# EAGLE board XMICRO-BP8 (EAGLE 6.3), part 1 of 2
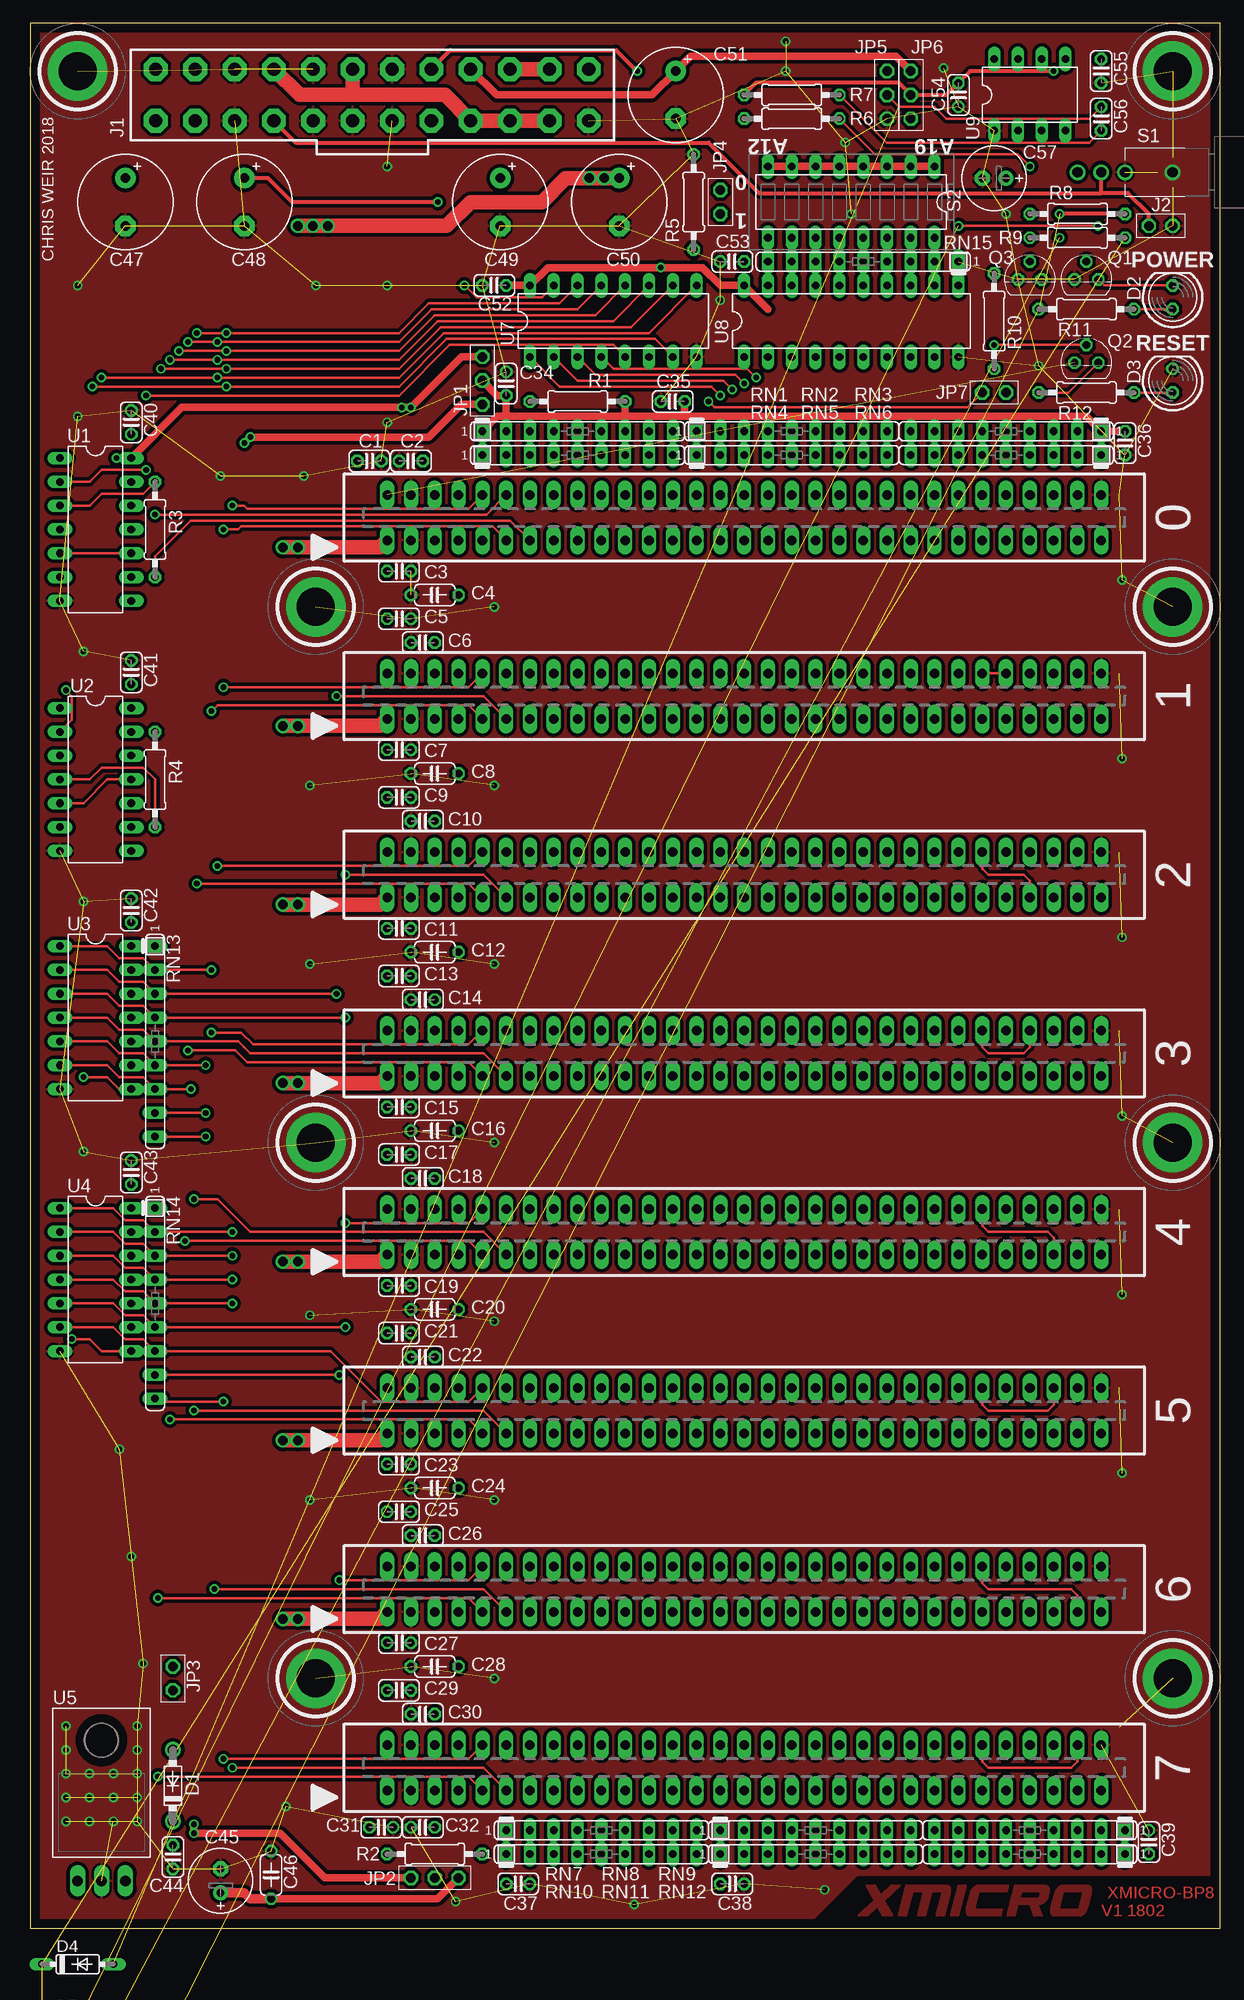
[diagram p0: board, top side]
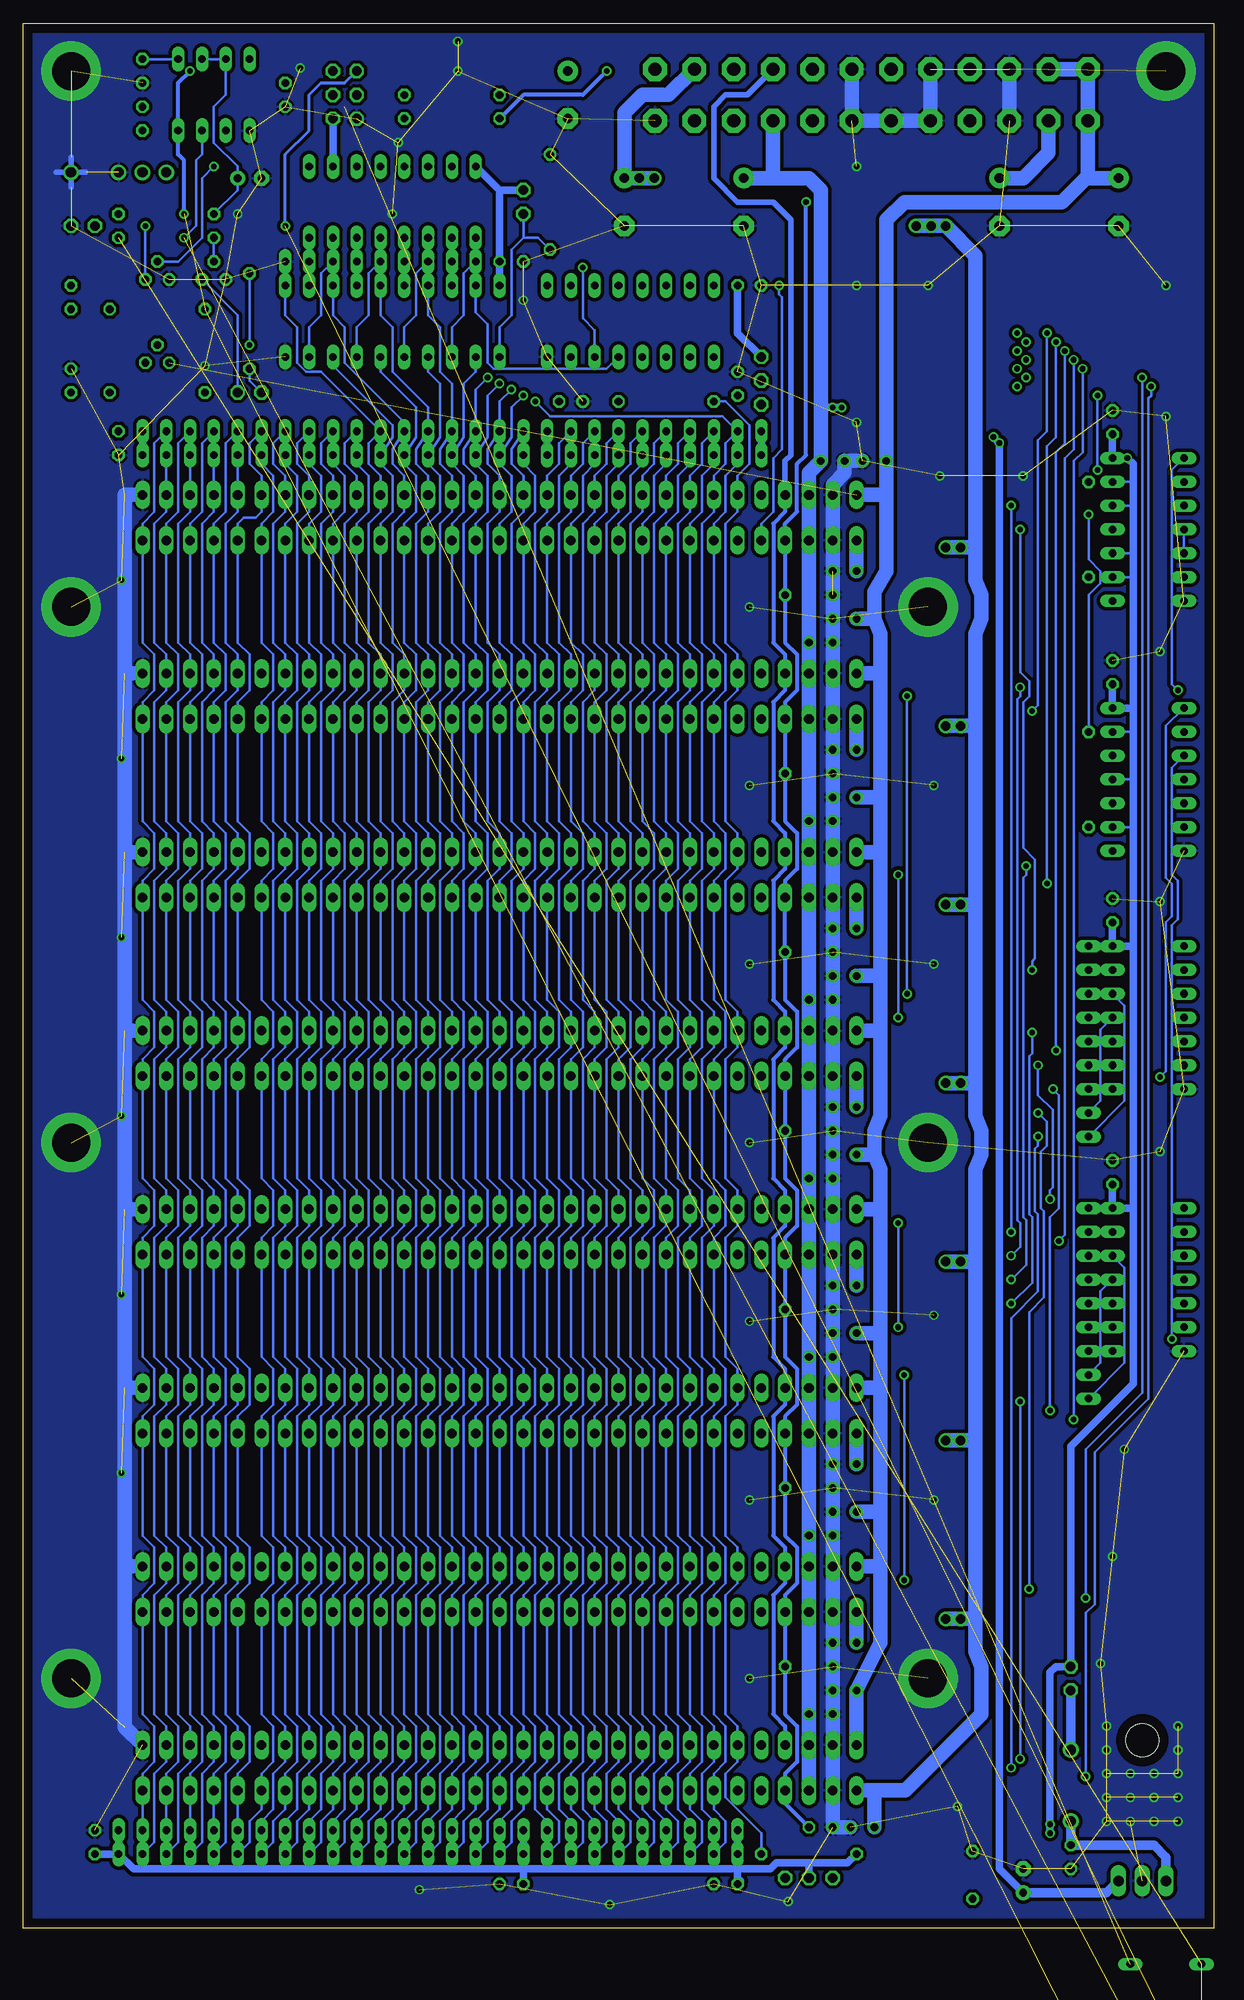
[diagram p1: board, bottom side, seen from below]

Size 127 x 203.2 mm. Coordinates in mm from the lower left corner, seen from the top.
Outline: 0,0 127,0 127,203.2 0,203.2 0,0
Copper layers (1*16): Top 0.03048125mm / dielectric 62mil / Bottom 0.03048125mm
Design rules "EasyEDA Conservative *": minimum track width 10mil, minimum drill 20mil, track to track 12mil, track to pad 12mil, pad to pad 12mil, via to via 12mil, smd to smd 8mil, copper to edge 40mil, drill to drill 10mil, minimum pad ring 10mil, minimum via ring 8mil, stop-mask expansion 4mil, vias tented up to drill 50mil, thermal gap 10mil
Net classes: 1 GND: width 0.254 mm, clearance 0.381 mm
tKeepout: area 30.2,182.9 to 42.9,189.2
bRestrict: area 121,186.4 to 122.9,188.3

## Footprints (pad centres in the part's own frame; a part is rotated, then mirrored left to right if it is on the bottom)
EDGE62F = drill 1.016 long: 1 -38.1,-2.426; 2 -38.1,2.426; 3 -35.56,-2.426; 4 -35.56,2.426; 5 -33.02,-2.426; 6 -33.02,2.426; 7 -30.48,-2.426; 8 -30.48,2.426; 9 -27.94,-2.426; 10 -27.94,2.426; 11 -25.4,-2.426; 12 -25.4,2.426; 13 -22.86,-2.426; 14 -22.86,2.426; 15 -20.32,-2.426; 16 -20.32,2.426; 17 -17.78,-2.426; 18 -17.78,2.426; 19 -15.24,-2.426; 20 -15.24,2.426; 21 -12.7,-2.426; 22 -12.7,2.426; 23 -10.16,-2.426; 24 -10.16,2.426; 25 -7.62,-2.426; 26 -7.62,2.426; 27 -5.08,-2.426; 28 -5.08,2.426; 29 -2.54,-2.426; 30 -2.54,2.426; 31 0,-2.426; 32 0,2.426; 33 2.54,-2.426; 34 2.54,2.426; 35 5.08,-2.426; 36 5.08,2.426; 37 7.62,-2.426; 38 7.62,2.426; 39 10.16,-2.426; 40 10.16,2.426; 41 12.7,-2.426; 42 12.7,2.426; 43 15.24,-2.426; 44 15.24,2.426; 45 17.78,-2.426; 46 17.78,2.426; 47 20.32,-2.426; 48 20.32,2.426; 49 22.86,-2.426; 50 22.86,2.426; 51 25.4,-2.426; 52 25.4,2.426; 53 27.94,-2.426; 54 27.94,2.426; 55 30.48,-2.426; 56 30.48,2.426; 57 33.02,-2.426; 58 33.02,2.426; 59 35.56,-2.426; 60 35.56,2.426; 61 38.1,-2.426; 62 38.1,2.426
C025-024X044 = drill 0.813 octagon: 1 -1.27,0; 2 1.27,0
C050-024X044 = drill 0.813 octagon: 1 -2.54,0; 2 2.54,0
E2,5-7 = drill 0.813 pad 1.6: + -1.27,0 | drill 0.813 pad 1.6 octagon: - 1.27,0
C-10-5 = drill 1.016 pad 2.184: + -2.54,0 | drill 1.016 pad 2.184 octagon: - 2.54,0
DO41-7.6 = drill 1.1 pad 1.7: A 3.81,0; C -3.81,0
LED5MM = drill 0.813 octagon: A -1.27,0; K 1.27,0
DO35-7 = drill 0.813 long: A 3.81,0; C -3.81,0
ATX24 = drill 1.4 pad 2.54 octagon: 1 23.1,-2.75; 2 18.9,-2.75; 3 14.7,-2.75; 4 10.5,-2.75; 5 6.3,-2.75; 6 2.1,-2.75; 7 -2.1,-2.75; 8 -6.3,-2.75; 9 -10.5,-2.75; 10 -14.7,-2.75; 11 -18.9,-2.75; 12 -23.1,-2.75; 13 23.1,2.75; 14 18.9,2.75; 15 14.7,2.75; 16 10.5,2.75; 17 6.3,2.75; 18 2.1,2.75; 19 -2.1,2.75; 20 -6.3,2.75; 21 -10.5,2.75; 22 -14.7,2.75; 23 -18.9,2.75; 24 -23.1,2.75
1X02 = drill 1.016 octagon: 1 -1.27,0; 2 1.27,0
1X03 = drill 1.016 octagon: 1 -2.54,0; 2 0,0; 3 2.54,0
TO92 = drill 0.813 octagon: 1 -1.27,0; 2 0,1.905; 3 1.27,0
0207/10 = drill 0.813 octagon: 1 -5.08,0; 2 5.08,0
SIL9 = drill 0.813 long: 1 -10.16,0; 2 -7.62,0; 3 -5.08,0; 4 -2.54,0; 5 0,0; 6 2.54,0; 7 5.08,0; 8 7.62,0; 9 10.16,0
T411013 = drill 1.1: P$1 5.08,0; P$2 7.62,0; P$3 10.16,0; P$4 0,0
SW-DIP8 = drill 0.813 long: 1 -8.89,-3.81; 2 -6.35,-3.81; 3 -3.81,-3.81; 4 -1.27,-3.81; 5 1.27,-3.81; 6 3.81,-3.81; 7 6.35,-3.81; 8 8.89,-3.81; 9 8.89,3.81; 10 6.35,3.81; 11 3.81,3.81; 12 1.27,3.81; 13 -1.27,3.81; 14 -3.81,3.81; 15 -6.35,3.81; 16 -8.89,3.81
DIL14 = drill 0.813 long: 1 -7.62,-3.81; 2 -5.08,-3.81; 3 -2.54,-3.81; 4 0,-3.81; 5 2.54,-3.81; 6 5.08,-3.81; 7 7.62,-3.81; 8 7.62,3.81; 9 5.08,3.81; 10 2.54,3.81; 11 0,3.81; 12 -2.54,3.81; 13 -5.08,3.81; 14 -7.62,3.81
TO220H = drill 1.118 long: 1 -2.54,-10.16; 2 0,-10.16; 3 2.54,-10.16 | hole 3.5: 0,4.826
DIL16 = drill 0.813 long: 1 -8.89,-3.81; 2 -6.35,-3.81; 3 -3.81,-3.81; 4 -1.27,-3.81; 5 1.27,-3.81; 6 3.81,-3.81; 7 6.35,-3.81; 8 8.89,-3.81; 9 8.89,3.81; 10 6.35,3.81; 11 3.81,3.81; 12 1.27,3.81; 13 -1.27,3.81; 14 -3.81,3.81; 15 -6.35,3.81; 16 -8.89,3.81
DIL20 = drill 0.813 long: 1 -11.43,-3.81; 2 -8.89,-3.81; 3 -6.35,-3.81; 4 -3.81,-3.81; 5 -1.27,-3.81; 6 1.27,-3.81; 7 3.81,-3.81; 8 6.35,-3.81; 9 8.89,-3.81; 10 11.43,-3.81; 11 11.43,3.81; 12 8.89,3.81; 13 6.35,3.81; 14 3.81,3.81; 15 1.27,3.81; 16 -1.27,3.81; 17 -3.81,3.81; 18 -6.35,3.81; 19 -8.89,3.81; 20 -11.43,3.81
DIL-08 = drill 0.813 long: 1 -3.81,-3.81; 2 -1.27,-3.81; 3 1.27,-3.81; 4 3.81,-3.81; 5 3.81,3.81; 6 1.27,3.81; 7 -1.27,3.81; 8 -3.81,3.81

## Placement (x,y rotation side)
0  XMICRO-BUS-PHYSICAL-EDGE62F  [EDGE62F]  76.2,150.5 0 top
1  XMICRO-BUS-PHYSICAL-EDGE62F  [EDGE62F]  76.2,131.44 0 top
2  XMICRO-BUS-PHYSICAL-EDGE62F  [EDGE62F]  76.2,112.39 0 top
3  XMICRO-BUS-PHYSICAL-EDGE62F  [EDGE62F]  76.2,93.34 0 top
4  XMICRO-BUS-PHYSICAL-EDGE62F  [EDGE62F]  76.2,74.3 0 top
5  XMICRO-BUS-PHYSICAL-EDGE62F  [EDGE62F]  76.2,55.24 0 top
6  XMICRO-BUS-PHYSICAL-EDGE62F  [EDGE62F]  76.2,36.2 0 top
7  XMICRO-BUS-PHYSICAL-EDGE62F  [EDGE62F]  76.2,17.14 0 top
C1  0.1uF  [C025-024X044]  36.2,156.53 0 top
C2  0.1uF  [C025-024X044]  40.64,156.53 180 top
C3  0.1uF  [C025-024X044]  39.37,144.78 0 top
C4  0.1uF  [C050-024X044]  43.18,142.24 180 top
C5  0.1uF  [C025-024X044]  39.37,139.7 0 top
C6  0.1uF  [C025-024X044]  41.91,137.16 180 top
C7  0.1uF  [C025-024X044]  39.37,125.73 0 top
C8  0.1uF  [C050-024X044]  43.18,123.19 180 top
C9  0.1uF  [C025-024X044]  39.37,120.65 0 top
C10  0.1uF  [C025-024X044]  41.91,118.11 180 top
C11  0.1uF  [C025-024X044]  39.37,106.68 0 top
C12  0.1uF  [C050-024X044]  43.18,104.14 180 top
C13  0.1uF  [C025-024X044]  39.37,101.6 0 top
C14  0.1uF  [C025-024X044]  41.91,99.06 180 top
C15  0.1uF  [C025-024X044]  39.37,87.63 0 top
C16  0.1uF  [C050-024X044]  43.18,85.09 180 top
C17  0.1uF  [C025-024X044]  39.37,82.55 0 top
C18  0.1uF  [C025-024X044]  41.91,80.01 180 top
C19  0.1uF  [C025-024X044]  39.37,68.58 0 top
C20  0.1uF  [C050-024X044]  43.18,66.04 180 top
C21  0.1uF  [C025-024X044]  39.37,63.5 0 top
C22  0.1uF  [C025-024X044]  41.91,60.96 180 top
C23  0.1uF  [C025-024X044]  39.37,49.53 0 top
C24  0.1uF  [C050-024X044]  43.18,46.99 180 top
C25  0.1uF  [C025-024X044]  39.37,44.45 0 top
C26  0.1uF  [C025-024X044]  41.91,41.91 180 top
C27  0.1uF  [C025-024X044]  39.37,30.48 0 top
C28  0.1uF  [C050-024X044]  43.18,27.94 180 top
C29  0.1uF  [C025-024X044]  39.37,25.4 0 top
C30  0.1uF  [C025-024X044]  41.91,22.86 180 top
C31  0.1uF  [C025-024X044]  37.47,10.79 0 top
C32  0.1uF  [C025-024X044]  41.91,10.79 180 top
C34  0.1uF  [C025-024X044]  50.8,164.78 90 top
C35  0.1uF  [C025-024X044]  68.58,162.88 180 top
C36  0.1uF  [C025-024X044]  116.84,158.43 270 top
C37  0.1uF  [C025-024X044]  52.07,4.76 0 top
C38  0.1uF  [C025-024X044]  74.93,4.76 0 top
C39  0.1uF  [C025-024X044]  119.38,9.21 90 top
C40  0.1uF  [C025-024X044]  10.79,160.66 90 top
C41  0.1uF  [C025-024X044]  10.79,133.99 90 top
C42  0.1uF  [C025-024X044]  10.79,108.58 90 top
C43  0.1uF  [C025-024X044]  10.79,80.64 90 top
C44  0.1uF  [C025-024X044]  15.24,7.62 270 top
C45  22uF 5V 1.5 Ohm ESR  [E2,5-7]  20.32,5.08 90 top
C46  0.1uF  [C050-024X044]  25.72,5.71 90 top
C47  100uF 25V  [C-10-5]  10.16,184.15 270 top
C48  220uF 10V  [C-10-5]  22.86,184.15 270 top
C49  220uF 10V  [C-10-5]  50.16,184.15 270 top
C50  100uF 25V  [C-10-5]  62.87,184.15 270 top
C51  220uF 10V  [C-10-5]  68.9,195.58 270 top
C52  0.1uF  [C025-024X044]  49.53,175.26 180 top
C53  0.1uF  [C025-024X044]  74.93,177.8 180 top
C54  0.1uF  [C025-024X044]  99.06,195.58 270 top
C55  10nF  [C025-024X044]  114.3,198.12 270 top
C56  0.1uF  [C025-024X044]  114.3,193.04 90 top
C57  10uF  [E2,5-7]  102.87,186.69 180 top
D1  1N5817  [DO41-7.6]  15.24,15.24 90 top
D2  GREEN  [LED5MM]  121.92,173.99 90 top
D3  RED  [LED5MM]  121.92,165.1 90 top
D4  [DO35-7]  5.08,-3.81 0 top  (outside the outline)
D5  [DO35-7]  5.08,-10.16 0 top  (outside the outline)
J1  ATX24  [ATX24]  36.51,195.58 180 top
J2  [1X02]  120.65,181.61 0 top
JP1  PINHD1X3THRU  [1X03]  48.26,165.1 270 top
JP2  PINHD1X3THRU  [1X03]  43.18,5.4 0 top
JP3  [1X02]  15.24,26.67 90 top
JP4  [1X02]  73.66,184.15 270 top
JP5  [1X03]  91.44,195.58 270 top
JP6  [1X03]  93.98,195.58 90 top
JP7  [1X02]  102.87,163.83 180 top
Q1  2N5088  [TO92]  112.71,175.9 0 top
Q2  2N4403  [TO92]  112.71,167 0 top
Q3  2N5088  [TO92]  106.68,175.9 0 top
R1  270  [0207/10]  58.42,162.88 180 top
R2  270  [0207/10]  43.18,7.94 0 top
R3  0  [0207/10]  13.34,149.22 270 top
R4  0  [0207/10]  13.34,122.56 90 top
R5  10k  [0207/10]  70.8,184.15 270 top
R6  100k  [0207/10]  81.28,193.04 0 top
R7  200k  [0207/10]  81.28,195.58 0 top
R8  22k  [0207/10]  111.76,182.88 180 top
R9  22k  [0207/10]  111.76,180.34 180 top
R10  470  [0207/10]  102.87,171.45 90 top
R11  470  [0207/10]  112.71,172.72 180 top
R12  220  [0207/10]  112.71,163.83 180 top
R13  10k  [0207/10]  6.35,-17.78 0 top  (outside the outline)
RN1  270  [SIL9]  58.42,159.7 0 top
RN2  270  [SIL9]  81.28,159.7 0 top
RN3  270  [SIL9]  104.14,159.7 180 top
RN4  270  [SIL9]  58.42,157.16 0 top
RN5  270  [SIL9]  81.28,157.16 0 top
RN6  270  [SIL9]  104.14,157.16 180 top
RN7  270  [SIL9]  60.96,10.48 0 top
RN8  270  [SIL9]  83.82,10.48 0 top
RN9  270  [SIL9]  106.68,10.48 180 top
RN10  270  [SIL9]  60.96,7.94 0 top
RN11  270  [SIL9]  83.82,7.94 0 top
RN12  270  [SIL9]  106.68,7.94 180 top
RN13  3.3k  [SIL9]  13.34,94.61 270 top
RN14  3.3k  [SIL9]  13.34,66.67 270 top
RN15  10k  [SIL9]  88.9,177.8 180 top
S1  SPDTT411013  [T411013]  121.92,187.32 180 top
S2  [SW-DIP8]  87.63,184.15 180 top
U1  7408  [DIL14]  6.99,149.22 270 top
U2  7404  [DIL14]  6.99,122.56 270 top
U3  7430  [DIL14]  6.99,97.16 270 top
U4  7430  [DIL14]  6.99,69.22 270 top
U5  TL-SCSI285  [TO220H]  7.62,15.24 0 top
U7  74138  [DIL16]  62.23,171.45 0 top
U8  74688  [DIL20]  87.63,171.45 0 top
U9  555  [DIL-08]  106.68,195.58 0 top

## Library data of the parts
0 1-7 C47-C51 J1 J2 JP1-JP7 Q1-Q3 S1 S2 U5 = Custom
C1-C32 C34-C44 C46 C52-C56 R1-R13 = resistor
C45 C57 = rcl
D1 D4 D5 = diode
D2 D3 = led
RN1-RN15 = resistor-sil; OC_FARNELL: unknown; OC_NEWARK: unknown
U1-U4 U7 U8 = 74xx-us
U9 = st-microelectronics; MF: Arrow Electronics; MPN: NE555N; OC_FARNELL: 1467742; OC_NEWARK: 89K1486

## Nets
!BUSACK: 0.20 1.20 2.20 3.20 4.20 5.20 6.20 7.20 RN1.5 RN7.5
!BUSRQ0: 0.10 RN14.2 U4.1
!BUSRQ1: 1.10 RN14.3 U4.2
!BUSRQ2: 2.10 RN14.4 U4.3
!BUSRQ3: 3.10 RN14.5 U4.4
!BUSRQ4: 4.10 RN14.6 U4.5
!BUSRQ5: 5.10 RN14.7 U4.6
!BUSRQ6: 6.10 RN14.8 U4.11
!BUSRQ7: 7.10 RN14.9 U4.12
!CBR: 0.12 1.12 2.12 3.12 4.12 5.12 6.12 7.12 R1.2 R2.2 R4.2
!CINH: 0.13 1.13 2.13 3.13 4.13 5.13 6.13 7.13 R3.2 RN4.2 RN10.2
!CS0: 0.9 U7.15
!CS1: 1.9 U7.14
!CS2: 2.9 U7.13
!CS3: 3.9 U7.12
!CS4: 4.9 U7.11
!CS5: 5.9 U7.10
!CS6: 6.9 U7.9
!CS7: 7.9 U7.7
!FETCH: 0.19 1.19 2.19 3.19 4.19 5.19 6.19 7.19 RN4.5 RN10.5
!HALT: 0.17 1.17 2.17 3.17 4.17 5.17 6.17 7.17 RN4.4 RN10.4
!INH0: 0.11 RN13.2 U3.1
!INH1: 1.11 RN13.3 U3.2
!INH2: 2.11 RN13.4 U3.3
!INH3: 3.11 RN13.5 U3.4
!INH4: 4.11 RN13.6 U3.5
!INH5: 5.11 RN13.7 U3.6
!INH6: 6.11 RN13.8 U3.11
!INH7: 7.11 RN13.9 U3.12
!INHPCS: U1.2 U7.5 U8.19
!INT: 0.51 1.51 2.51 3.51 4.51 5.51 6.51 7.51 RN6.6 RN12.6
!IRQ0: 0.52 0.53 1.53 2.53 3.53 4.53 5.53 6.53 7.53 RN3.6 RN9.6
!IRQ1: 0.54 1.52 1.54 2.54 3.54 4.54 5.54 6.54 7.54 RN6.5 RN12.5
!IRQ2: 0.55 1.55 2.52 2.55 3.55 4.55 5.55 6.55 7.55 RN3.5 RN9.5
!IRQ3: 0.56 1.56 2.56 3.52 3.56 4.56 5.56 6.56 7.56 RN6.4 RN12.4
!IRQ4: 0.57 1.57 2.57 3.57 4.52 4.57 5.57 6.57 7.57 RN3.4 RN9.4
!IRQ5: 0.58 1.58 2.58 3.58 4.58 5.52 5.58 6.58 7.58 RN6.3 RN12.3
!IRQ6: 0.59 1.59 2.59 3.59 4.59 5.59 6.52 6.59 7.59 RN3.3 RN9.3
!IRQ7: 0.60 1.60 2.60 3.60 4.60 5.60 6.60 7.52 7.60 RN6.2 RN12.2
!NMI: 0.61 1.61 2.61 3.61 4.61 5.61 6.61 7.61 RN3.2 RN9.2
!RD: 0.21 1.21 2.21 3.21 4.21 5.21 6.21 7.21 RN4.6 RN10.6
!RST: 0.14 1.14 2.14 3.14 4.14 5.14 6.14 7.14 JP7.2 R10.1 RN1.2 RN7.2
!WAIT: 0.18 1.18 2.18 3.18 4.18 5.18 6.18 7.18 RN1.4 RN7.4
!WR: 0.22 1.22 2.22 3.22 4.22 5.22 6.22 7.22 RN1.6 RN7.6
+3.3V: 0.2 1.2 2.2 3.2 4.2 5.2 6.2 7.2 C1.1 C5.1 C9.1 C13.1 C17.1 C21.1 C25.1 C29.1 C47.+ J1.1 J1.2 J1.13 Q2.1
+5VSB: 0.8 1.8 2.8 3.8 4.8 5.8 6.8 7.8 C51.+ J1.9 JP6.3
+12V: 0.1 1.1 2.1 3.1 4.1 5.1 6.1 7.1 C3.1 C7.1 C11.1 C15.1 C19.1 C23.1 C27.1 C31.1 C50.+ J1.10 J1.11
-12V: 0.7 1.7 2.7 3.7 4.7 5.7 6.7 7.7 C4.1 C8.1 C12.1 C16.1 C20.1 C24.1 C28.1 C32.1 C48.+ J1.14
A0: 0.23 1.23 2.23 3.23 4.23 5.23 6.23 7.23 RN4.7 RN10.7
A1: 0.24 1.24 2.24 3.24 4.24 5.24 6.24 7.24 RN1.7 RN7.7
A2: 0.25 1.25 2.25 3.25 4.25 5.25 6.25 7.25 RN4.8 RN10.8
A3: 0.26 1.26 2.26 3.26 4.26 5.26 6.26 7.26 RN1.8 RN7.8
A4: 0.27 1.27 2.27 3.27 4.27 5.27 6.27 7.27 RN4.9 RN10.9
A5: 0.28 1.28 2.28 3.28 4.28 5.28 6.28 7.28 RN1.9 RN7.9
A6: 0.29 1.29 2.29 3.29 4.29 5.29 6.29 7.29 RN5.2 RN11.2
A7: 0.30 1.30 2.30 3.30 4.30 5.30 6.30 7.30 RN2.2 RN8.2
A8: 0.31 1.31 2.31 3.31 4.31 5.31 6.31 7.31 RN5.3 RN11.3 U7.1
A9: 0.32 1.32 2.32 3.32 4.32 5.32 6.32 7.32 RN2.3 RN8.3 U7.2
A10: 0.33 1.33 2.33 3.33 4.33 5.33 6.33 7.33 RN5.4 RN11.4 U7.3
A11: 0.34 1.34 2.34 3.34 4.34 5.34 6.34 7.34 RN2.4 RN8.4 U7.4
A12: 0.35 1.35 2.35 3.35 4.35 5.35 6.35 7.35 RN5.5 RN11.5 U8.2
A13: 0.36 1.36 2.36 3.36 4.36 5.36 6.36 7.36 RN2.5 RN8.5 U8.17
A14: 0.37 1.37 2.37 3.37 4.37 5.37 6.37 7.37 RN5.6 RN11.6 U8.4
A15: 0.38 1.38 2.38 3.38 4.38 5.38 6.38 7.38 RN2.6 RN8.6 U8.15
A16: 0.39 1.39 2.39 3.39 4.39 5.39 6.39 7.39 RN5.7 RN11.7 U8.6
A17: 0.40 1.40 2.40 3.40 4.40 5.40 6.40 7.40 RN2.7 RN8.7 U8.13
A18: 0.41 1.41 2.41 3.41 4.41 5.41 6.41 7.41 RN5.8 RN11.8 U8.8
A19: 0.42 1.42 2.42 3.42 4.42 5.42 6.42 7.42 RN2.8 RN8.8 U8.11
CKLAUX: 0.16 1.16 2.16 3.16 4.16 5.16 6.16 7.16 RN1.3 RN7.3
CLK: 0.15 1.15 2.15 3.15 4.15 5.15 6.15 7.15 RN4.3 RN10.3
D0: 0.43 1.43 2.43 3.43 4.43 5.43 6.43 7.43 RN5.9 RN11.9
D1: 0.44 1.44 2.44 3.44 4.44 5.44 6.44 7.44 RN2.9 RN8.9
D2: 0.45 1.45 2.45 3.45 4.45 5.45 6.45 7.45 RN6.9 RN12.9
D3: 0.46 1.46 2.46 3.46 4.46 5.46 6.46 7.46 RN3.9 RN9.9
D4: 0.47 1.47 2.47 3.47 4.47 5.47 6.47 7.47 RN6.8 RN12.8
D5: 0.48 1.48 2.48 3.48 4.48 5.48 6.48 7.48 RN3.8 RN9.8
D6: 0.49 1.49 2.49 3.49 4.49 5.49 6.49 7.49 RN6.7 RN12.7
D7: 0.50 1.50 2.50 3.50 4.50 5.50 6.50 7.50 RN3.7 RN9.7
GND [GND]: 0.3 0.4 0.62 1.3 1.4 1.62 2.3 2.4 2.62 3.3 3.4 3.62 4.3 4.4 4.62 5.3 5.4 5.62 6.3 6.4 6.62 7.3 7.4 7.62 C1.2 C2.2 C3.2 C4.2 C5.2 C6.2 C7.2 C8.2 C9.2 C10.2 C11.2 C12.2 C13.2 C14.2 C15.2 C16.2 C17.2 C18.2 C19.2 C20.2 C21.2 C22.2 C23.2 C24.2 C25.2 C26.2 C27.2 C28.2 C29.2 C30.2 C31.2 C32.2 C34.2 C35.2 C36.2 C37.2 C38.2 C39.2 C40.2 C41.2 C42.2 C43.2 C44.2 C45.- C46.2 C47.- C48.- C49.- C50.- C51.- C52.2 C53.2 C54.2 C55.2 C57.- D3.K J1.3 J1.5 J1.7 J1.15 J1.17 J1.18 J1.19 J1.24 J2.2 JP5.3 Q1.1 Q3.1 R5.1 RN15.1 S1.P$1 S1.P$4 U1.7 U2.7 U3.7 U4.7 U5.2 U7.8 U8.10 U9.1
N$1: D2.K JP5.1 Q1.3 R13.1
N$2: Q2.3 R12.2
N$3: Q2.2 R10.2
N$4: D5.A U9.3
N$5: JP7.1 Q3.3
N$6: D3.A R12.1
N$7: C45.+ C46.1 JP1.3 JP2.3 U5.3
N$8: U2.1 U3.8
N$9: U1.1 U2.2
N$10: U2.3 U4.8
N$11: RN15.2 S2.16 U8.12
N$12: RN15.3 S2.15 U8.9
N$13: RN15.4 S2.14 U8.14
N$14: RN15.5 S2.13 U8.7
N$17: RN15.6 S2.12 U8.16
N$18: RN15.7 S2.11 U8.5
N$19: J1.16 J2.1 S1.P$2
N$21: R4.1 U2.4
N$22: Q1.2 R6.2
N$23: D1.A JP3.1
N$24: D2.A R11.1
N$25: C55.1 U9.5
N$26: C44.1 D1.C U5.1
N$27: C37.1 C38.1 C39.1 JP2.2 R2.1 RN7.1 RN8.1 RN9.1 RN10.1 RN11.1 RN12.1
N$28: C34.1 C35.1 C36.1 JP1.2 R1.1 RN1.1 RN2.1 RN3.1 RN4.1 RN5.1 RN6.1
N$29: R3.1 U1.3
N$30: RN15.8 S2.10 U8.18
N$31: D4.C D5.C R9.1
N$35: RN15.9 S2.9 U8.3
N$36: JP4.2 R5.2 U8.1
N$38: C54.1 JP6.2 R7.1 R8.1 R11.2 R13.2 U9.4 U9.8
N$39: C56.2 D4.A JP5.2
N$46: Q3.2 R9.2
N$75: C56.1 R7.2 U9.2
N$76: C57.+ R8.2 U9.6 U9.7
PG: J1.8 R6.1
VCC: 0.5 0.6 1.5 1.6 2.5 2.6 3.5 3.6 4.5 4.6 5.5 5.6 6.5 6.6 7.5 7.6 C2.1 C6.1 C10.1 C14.1 C18.1 C22.1 C26.1 C30.1 C40.1 C41.1 C42.1 C43.1 C49.+ C52.1 C53.1 J1.4 J1.6 J1.21 J1.22 J1.23 JP1.1 JP2.1 JP3.2 JP4.1 JP6.1 RN13.1 RN14.1 S2.1 S2.2 S2.3 S2.4 S2.5 S2.6 S2.7 S2.8 U1.4 U1.5 U1.9 U1.10 U1.12 U1.13 U1.14 U2.5 U2.9 U2.11 U2.13 U2.14 U3.14 U4.14 U7.6 U7.16 U8.20